# Altium PCB Microphone_Module_PCB_14-8-21.PcbDoc (part 2 of 2)
Units mm, origin at the board's own origin, x right, y up, seen from the top; angles counter-clockwise.
Board outline 220 x 220 mm, 4 copper layers (Top Layer, Layer 3, Layer 4, Bottom Layer), stack 0.683 mm thick; 104 components, 72 nets, 396 pads, 233 vias.
Unrouted connection lines stored in the file: 15.
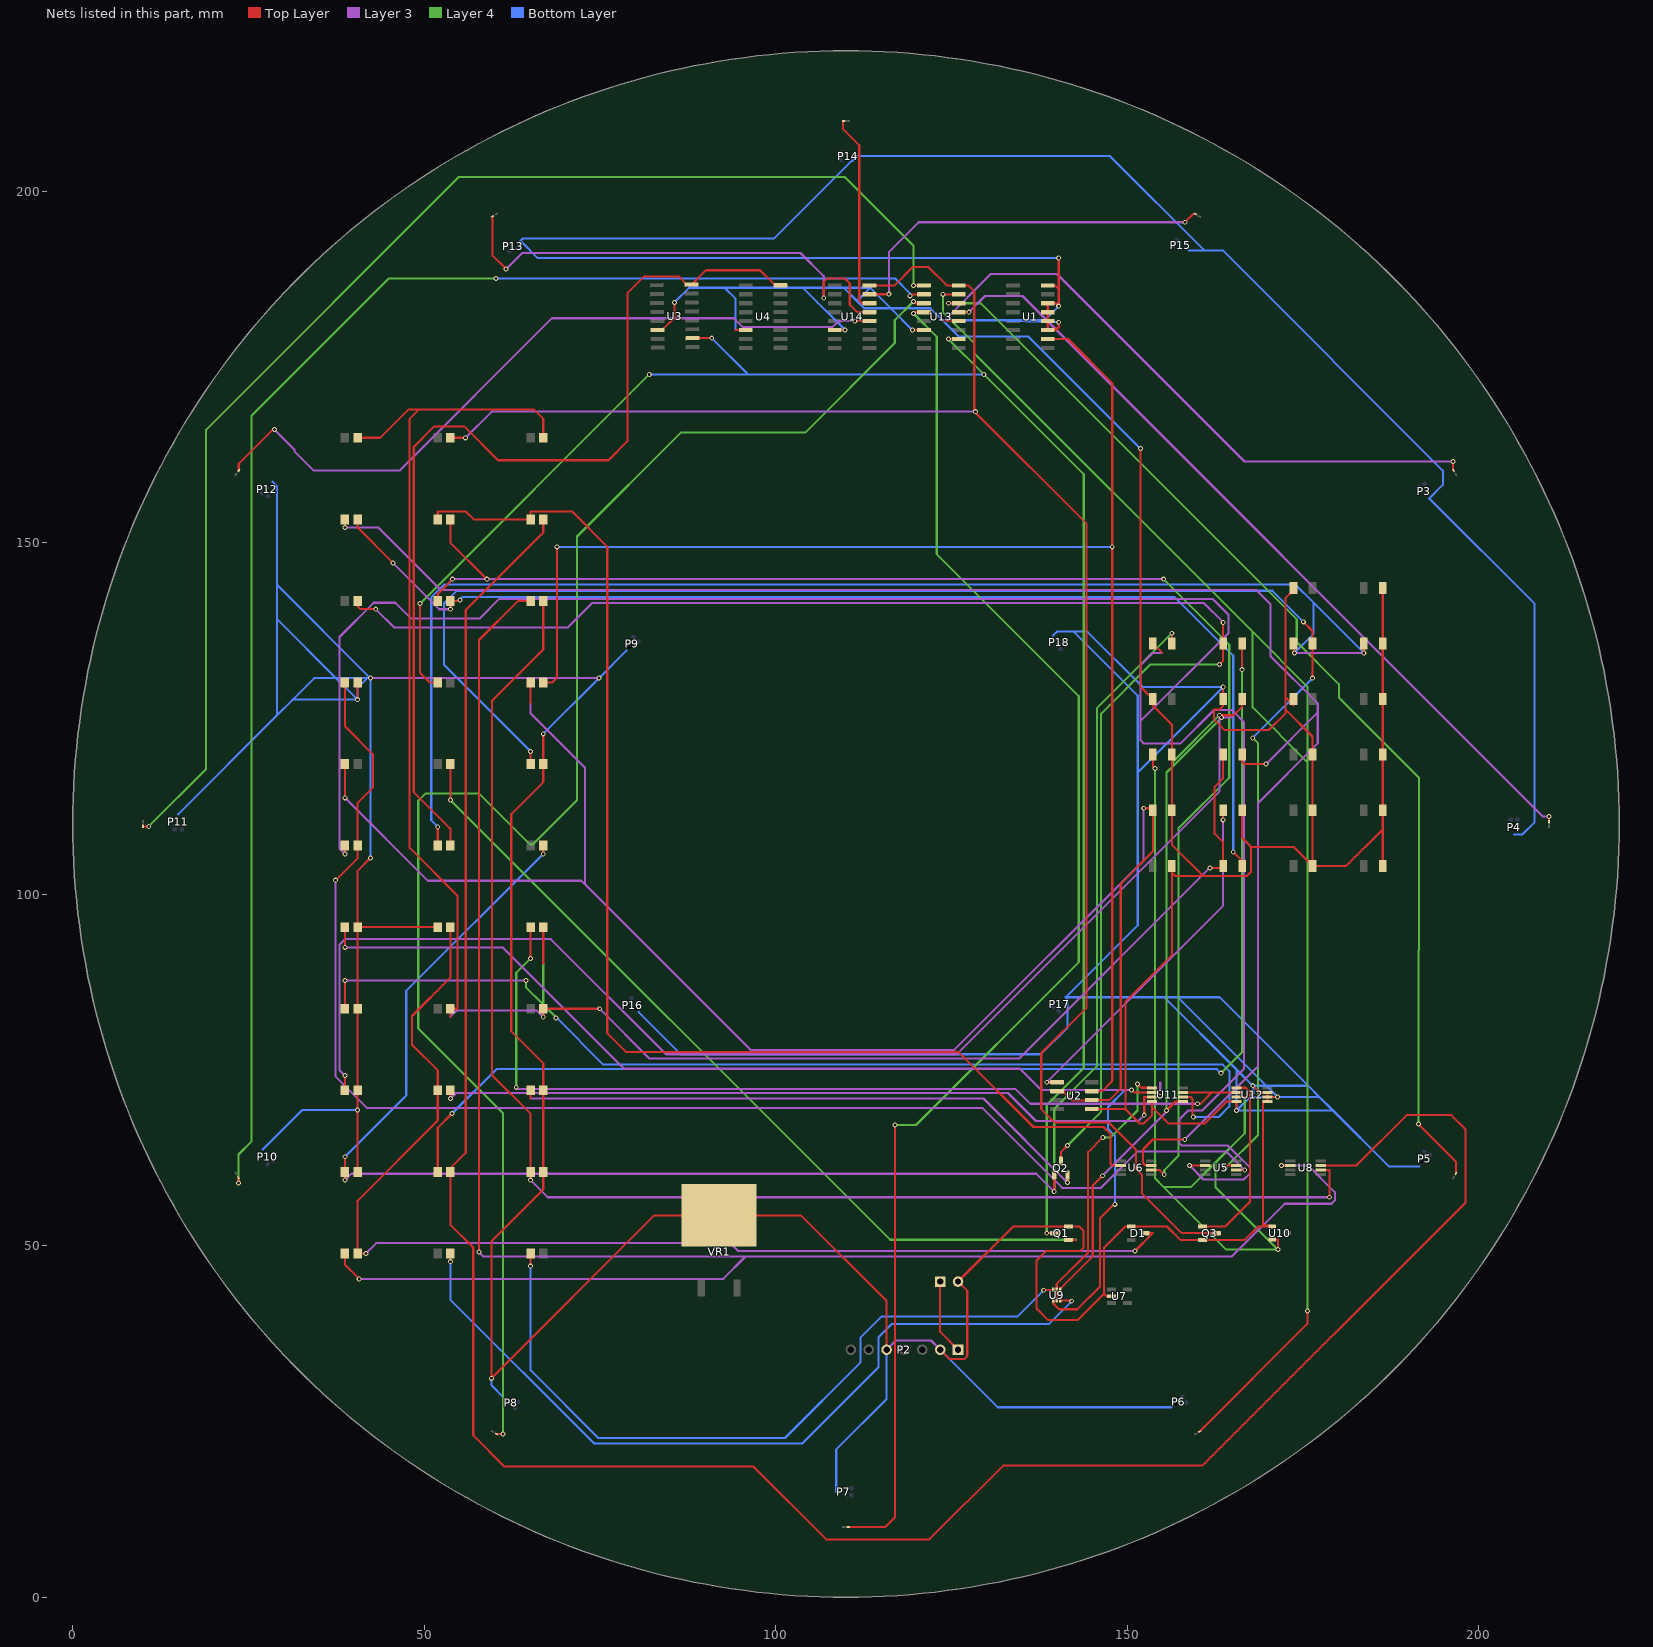
[diagram p4: the nets of this part, all layers, seen from the top]

## Via types
v1: diameter 0.7, hole 0.4, Top Layer to Bottom Layer, 233 vias

## Nets (pads, with @x,y where several pads share a name; then routed paths per layer and width w, separated by ;. In a path a pad name is that pad's centre, name@x,y a point inside that pad or via, vN(x,y) a via of type N, cw(c..) or ccw(c..) an arc to the next point about the centre after c; other vN are vias at no path point) (continued)
GND: C1.1 C2.1 C3.1 C5.1 C6.1 C7.1 C8.1 C10.1 C11.1 C15.2 C16.1 C17.1 C18.1 C19.1 C20.2 C21.2 C22.2 D1.1 P1.2 P2.2 P2.5 P3.3 P4.3 P5.3 P6.3 P7.3 P8.3 P9.3 P10.3 P11.3 P12.3 P13.3 P14.3 P15.3 P16.3 P17.3 P18.3 Q1.2 Q3.2 R7.2 R8.2 R18.2 R19.2 R20.2 R26.1 R27.1 R28.2 R29.2 U1.3 U1.4 U1.5 U1.6 U1.8 U2.1 U3.14 U4.14 U7.2 U10.1 U11.4 U12.4 U12.5 U12.6 U12.7 U13.14 U14.14 VR1.2 | length 1685.4
  Top Layer w0.3: R18.2@40.522,60.512 v1(40.522,69.317) R29.2@40.522,72.115 R28.2@40.522,83.718 R27.1@40.522,95.321 ; v1(40.522,127.686) R8.2@40.522,130.131 ; v1(42.342,105.156) 40.522,103.336 R27.1@40.522,95.321 ; R26.1@51.925,95.321 R27.1@40.522,95.321 ; v1(66.929,122.829) R7.2@66.929,118.528 66.929,115.951 62.382,111.404 62.382,80.518 66.929,75.971 R19.2@66.929,72.115 R20.2@66.929,60.512 66.929,58.013 59.563,50.648 v1(59.563,31.14) 82.747,54.325 VR1.2@91.952,54.325 103.587,54.325 115.776,42.136 P2.5@115.776,35.219 ; U3.14@83.188,180.294 83.873,180.294 85.598,182.019 v1(85.598,184.201) ; 94.296,180.275 U4.14@95.74,180.275 ; U14.14@108.407,180.274 v1(109.869,180.274) ; v1(119.446,180.274) U13.14@121.08,180.274 ; P2.2@123.396,35.219 124.706,33.909 126.873,33.909 127.254,34.29 127.254,43.588 P1.2@125.936,44.907 133.768,52.739 Q1.2@141.632,52.739 143.206,52.739 143.766,52.18 143.766,49.724 143.321,49.279 138.504,49.279 137.096,47.872 137.096,41.115 138.795,39.416 142.931,39.416 146.695,43.18 ; U1.8@138.703,186.624 139.7,186.624 140.259,186.066 ; v1(140.259,181.381) 140.259,180.657 ; v1(140.259,190.5) 140.259,186.066 ; U2.1@144.967,69.454 149.571,69.454 149.709,69.454 151.765,67.398 152.361,67.398 153.543,68.58 153.543,69.73 ; U7.2@147.752,42.815 147.06,42.815 146.695,43.18 ; 149.751,69.412 149.751,84.721 156.352,91.322 156.352,103.103 ; v1(151.892,163.398) 151.892,129.521 C21.2@153.652,127.761 153.652,126.853 156.352,124.153 C19.1@156.352,119.858 C1.1@156.352,111.955 156.352,107.061 160.803,102.61 ; U11.4@153.538,70.523 153.543,70.517 153.543,69.73 ; C11.1@156.352,104.052 156.352,103.103 ; v1(163.655,129.489) C22.2@163.655,127.761 163.655,126.804 163.119,126.268 162.369,126.268 162.369,124.854 163.83,123.393 170.18,123.393 172.542,125.755 172.542,126.27 ; v1(165.557,69.241) U12.4@165.557,70.523 164.147,70.523 161.003,67.378 155.894,67.378 153.543,69.73 ; C2.1@166.355,111.955 166.355,108.003 167.64,106.719 ; v1(167.869,72.771) 168.817,71.823 U12.7@169.977,71.823 U12.6@169.977,71.173 ; v1(171.399,71.173) U12.6@169.977,71.173 ; C20.2@173.659,127.761 173.659,126.872 173.364,127.166 172.542,127.988 ; C15.2@173.659,143.568 173.659,143.281 172.542,142.165 172.542,127.988 ; C8.1@186.362,104.052 186.362,109.22 ; C16.1@186.362,143.568 C17.1@186.362,135.664 C18.1@186.362,127.761 C3.1@186.362,119.858 C10.1@186.362,111.955 186.362,109.22 ; U1.3@138.703,180.274 139.876,180.274 140.259,180.657 ; U1.3@138.703,180.274 140.259,180.657 ; U1.3@138.703,180.274 U1.4@138.703,181.544 U1.5@138.703,182.814 U1.6@138.703,184.084 139.842,184.084 v1(140.259,183.667) 140.259,186.066 ; 146.695,43.18 146.695,49.711 149.723,52.739 D1.1@150.572,52.739 155.668,52.739 157.568,50.839 Q3.2@160.734,50.839 166.714,50.839 168.604,52.729 U10.1@170.656,52.729 169.682,52.946 169.342,53.021 169.342,70.523 U12.5@169.977,70.523 U12.6@169.977,71.173 ; 156.352,103.103 156.845,102.61 160.803,102.61 ; 160.803,102.61 167.005,102.61 167.64,103.245 167.64,106.719 ; 167.64,106.719 173.692,106.719 C7.1@176.359,104.052 ; 172.542,126.27 172.542,127.988 ; 172.542,126.27 176.359,122.453 C5.1@176.359,119.858 C6.1@176.359,111.955 176.359,105.095 C7.1@176.359,104.052 ; C7.1@176.359,104.052 176.359,104.038 181.18,104.038 186.362,109.22
  Layer 3 w0.3: v1(42.342,130.759) v1(74.859,130.759) ; P2.5@115.776,35.219 117.082,36.525 122.089,36.525 P2.2@123.396,35.219
  Bottom Layer w0.3: P11.3@14.984,111.383 29.032,125.431 ; P10.3@27.021,63.689 32.649,69.317 v1(40.522,69.317) ; P12.3@28.407,158.704 28.411,158.704 28.733,158.383 28.733,158.379 29.032,158.08 29.032,144.069 ; 40.522,130.131 40.522,129.371 ; v1(42.342,105.156) v1(42.342,130.759) ; v1(59.563,31.14) 59.563,30.134 P8.3@61.294,28.404 ; v1(66.929,122.829) v1(74.859,130.759) P9.3@78.742,134.642 ; P16.3@80.516,83.239 86.514,77.241 137.718,77.241 141.503,81.026 141.503,85.113 P17.3@141.258,85.358 ; v1(85.598,184.201) 87.681,186.284 92.71,186.284 ; 94.296,180.275 94.296,184.697 92.71,186.284 ; P7.3@108.617,14.984 108.617,21.035 115.776,28.194 P2.5@115.776,35.219 ; v1(109.869,180.274) 103.86,186.284 ; P14.3@111.383,205.015 147.566,205.015 160.985,191.596 ; 111.488,205.015 111.359,204.886 111.359,204.731 110.978,204.35 110.823,204.35 99.741,193.269 63.984,193.269 P13.3@63.691,192.976 66.167,190.5 v1(140.259,190.5) ; v1(119.446,180.274) 116.344,183.376 ; P2.2@123.396,35.219 131.59,27.024 P6.3@156.309,27.024 ; P18.3@139.482,136.835 140.011,137.363 142.392,137.363 ; v1(140.259,181.381) 130.773,181.659 ; v1(140.259,183.667) 138.251,181.659 130.773,181.659 ; v1(151.892,163.398) 135.941,179.349 126.035,179.349 123.725,181.659 ; P15.3@158.707,191.596 160.985,191.596 ; P5.3@191.593,61.296 187.223,61.296 179.278,69.241 ; P4.3@205.044,108.479 206.168,108.479 207.96,110.271 207.96,141.331 P3.3@192.979,156.311 194.919,158.251 194.919,160.264 163.586,191.596 160.985,191.596 ; 29.032,125.431 29.032,139.176 ; 29.032,125.431 31.287,127.686 ; 29.032,139.176 37.449,130.759 ; 29.032,139.176 29.032,144.069 ; 29.032,144.069 v1(42.342,130.759) ; 31.287,127.686 34.36,130.759 37.449,130.759 ; 31.287,127.686 v1(40.522,127.686) ; 37.449,130.759 41.91,130.759 ; 37.449,130.759 v1(40.522,127.686) ; v1(40.522,127.686) 40.522,129.371 ; 40.522,129.371 41.91,130.759 ; 41.91,130.759 v1(42.342,130.759) ; 92.71,186.284 103.86,186.284 ; 103.86,186.284 109.677,186.284 ; 109.677,186.284 111.557,184.404 ; 109.677,186.284 113.436,186.284 ; 111.557,184.404 112.585,183.376 116.344,183.376 ; 111.557,184.404 113.436,186.284 ; 113.436,186.284 116.344,183.376 ; 116.344,183.376 122.008,183.376 123.725,181.659 ; 123.725,181.659 130.773,181.659 ; P17.3@141.258,85.358 155.282,85.358 ; P17.3@141.258,85.358 151.499,95.598 151.499,117.333 ; 142.392,137.363 144.323,137.363 152.197,129.489 v1(163.655,129.489) 151.499,117.333 ; 142.392,137.363 151.499,128.257 151.499,117.333 ; 155.282,85.358 157.214,85.358 ; 155.282,85.358 165.557,75.082 ; 157.214,85.358 163.161,85.358 175.748,72.771 ; 157.214,85.358 169.801,72.771 ; v1(165.557,69.241) 179.278,69.241 ; v1(165.557,69.241) 167.49,71.173 ; v1(165.557,69.241) 165.557,75.082 ; 165.557,75.082 v1(167.869,72.771) ; 167.49,71.173 v1(171.399,71.173) ; 167.49,71.173 167.957,71.641 167.957,72.682 v1(167.869,72.771) ; v1(167.869,72.771) 169.801,72.771 ; 169.801,72.771 175.748,72.771 ; 169.801,72.771 v1(171.399,71.173) ; v1(171.399,71.173) 177.346,71.173 ; 175.748,72.771 177.346,71.173 ; 177.346,71.173 179.278,69.241
in: Q1.3 R3.1 U3.2 U13.2 | length 257.2
  Top Layer w0.3: v1(49.403,141.351) 49.403,131.528 50.8,130.131 R3.1@51.925,130.131 ; U3.2@88.16,179.113 v1(90.907,179.113) ; v1(124.568,179.004) U13.2@126.03,179.004 ; v1(138.557,51.791) v1(138.557,51.791) Q1.3@139.672,51.789
  Layer 4 w0.3: v1(49.403,141.351) v1(82.017,173.965) ; v1(124.568,179.004) v1(129.608,173.965) 143.819,159.754 143.819,75.289 138.557,70.028 v1(138.557,51.791)
  Bottom Layer w0.3: v1(82.017,173.965) 96.055,173.965 ; 90.272,179.113 v1(90.907,179.113) 96.055,173.965 ; v1(129.608,173.965) 96.055,173.965
L1: D2.2 U13.4 | length 89.7
  Top Layer w0.3: 123.916,181.544 U13.4@126.03,181.544 ; v1(196.345,161.569) 196.378,161.537 196.378,160.353 D2.2@196.428,160.303
  Layer 3 w0.3: 123.916,181.544 130.611,188.239 140.021,188.239 166.691,161.569 v1(196.345,161.569)
L2: D3.2 U13.5 | length 116.3
  Top Layer w0.3: U13.5@126.03,182.814 v1(127.483,182.814) ; D3.2@210.005,110.35 v1(210.005,111.074)
  Layer 3 w0.3: v1(127.483,182.814) 129.783,185.115 135.103,185.115 209.144,111.074 v1(210.005,111.074)
L3: D4.2 U13.6 | length 157.9
  Top Layer w0.3: v1(124.562,184.084) U13.6@126.03,184.084 ; v1(191.425,67.325) 196.778,61.972 D4.2@196.778,60.303
  Layer 4 w0.3: v1(124.562,184.084) 129.148,184.084 174.117,139.116 174.117,135.89 180.111,129.896 180.111,127.991 191.516,116.586 191.516,92.055 191.425,91.964 v1(191.425,67.325)
L4: D5.2 U13.7 | length 213.6
  Top Layer w0.3: v1(123.8,185.354) U13.7@126.03,185.354 ; D5.2@160.303,23.572 175.641,38.91 v1(175.641,40.716)
  Layer 4 w0.3: v1(123.8,185.354) 123.8,182.804 128.233,178.371 128.233,176.936 167.843,137.326 ; v1(175.641,40.716) 175.641,118.796 ; 167.843,137.326 175.641,129.528 175.641,118.796 ; 167.843,137.326 167.843,126.594 175.641,118.796
L5: D6.2 U13.12 | length 202.3
  Top Layer w0.3: D6.2@110.35,10 115.57,10 116.967,11.397 v1(116.967,67.183) ; v1(119.609,182.626) 119.797,182.814 U13.12@121.08,182.814
  Layer 4 w0.3: v1(116.967,67.183) 119.956,67.183 143.117,90.344 143.117,128.179 122.911,148.386 122.911,179.324 v1(119.609,182.626)
L6: D7.2 U13.11 | length 227.3
  Top Layer w0.3: D7.2@60.303,23.222 v1(61.214,23.222) ; v1(119.609,184.328) 119.852,184.084 U13.11@121.08,184.084
  Layer 4 w0.3: v1(61.214,23.222) 61.214,68.834 49.15,80.898 49.15,113.318 50.157,114.325 57.81,114.325 65.024,107.112 65.481,107.112 71.74,113.37 71.74,150.904 86.51,165.675 104.182,165.675 116.942,178.434 116.942,181.661 v1(119.609,184.328)
L7: D8.2 U13.10 | length 215.8
  Top Layer w0.3: v1(23.571,58.928) D8.2@23.571,59.696 ; v1(119.111,185.137) 119.22,185.137 119.437,185.354 U13.10@121.08,185.354
  Layer 4 w0.3: v1(23.571,58.928) 23.571,62.992 25.448,64.869 25.448,168.107 44.946,187.604 v1(60.198,187.604)
  Bottom Layer w0.3: v1(60.198,187.604) 116.992,187.604 119.161,185.436 119.161,185.187 v1(119.111,185.137)
L8: D9.2 U13.9 | length 187.3
  Top Layer w0.3: D9.2@10.001,109.65 10.007,109.655 v1(10.81,109.655) ; v1(119.609,186.614) 119.619,186.624 U13.9@121.08,186.624
  Layer 4 w0.3: v1(10.81,109.655) 18.974,117.819 18.974,166.085 54.933,202.044 109.813,202.044 119.609,192.249 v1(119.609,186.614)
L9: D10.2 U14.4 | length 105.1
  Top Layer w0.3: D10.2@23.618,160.267 23.618,161.272 28.449,166.103 v1(28.69,166.103) ; v1(111.252,181.544) U14.4@113.357,181.544
  Layer 3 w0.3: v1(28.69,166.103) 31.526,163.267 31.526,163.026 34.285,160.267 46.482,160.267 68.16,181.945 94.026,181.945 95.25,180.721 108.102,180.721 108.926,181.544 v1(111.252,181.544)
L10: D11.2 U14.5 | length 71.7
  Top Layer w0.3: D11.2@59.697,196.428 59.697,190.9 v1(61.646,188.951) ; v1(106.832,184.81) 106.832,187.122 107.315,187.604 109.855,187.604 110.541,186.919 110.541,183.856 111.582,182.814 U14.5@113.357,182.814
  Layer 3 w0.3: v1(61.646,188.951) 63.926,191.23 103.519,191.23 106.832,187.917 v1(106.832,184.81)
L11: D12.2 U14.6 | length 28.2
  Top Layer w0.3: D12.2@109.65,210 109.55,210 109.55,208.89 111.887,206.553 111.887,184.468 112.27,184.084 U14.6@113.357,184.084
L12: D13.2 U14.7 | length 54.6
  Top Layer w0.3: U14.7@113.357,185.354 113.371,185.369 v1(116.093,185.369) ; v1(158.212,195.605) 159.385,196.778 D13.2@159.697,196.778
  Layer 3 w0.3: v1(116.093,185.369) 116.093,191.361 120.338,195.605 v1(158.212,195.605)
NetC1_2: C1.2 R1.1 R2.1 U2.2 U2.6 | length 237.2
  Top Layer w0.3: v1(38.722,113.729) R1.1@38.722,118.528 ; 65.129,127.13 R2.1@65.129,130.131 ; U2.6@140.027,71.994 140.177,71.844 141.003,71.844 142.184,70.663 144.906,70.663 U2.2@144.967,70.724 147.458,70.724 149.081,72.348 149.081,101.517 153.652,106.088 C1.2@153.652,111.955 153.652,112.243 v1(152.349,112.243)
  Layer 3 w0.3: v1(38.722,113.729) 50.521,101.93 72.359,101.93 72.873,101.416 ; 65.129,127.13 65.126,127.127 65.126,125.73 72.873,117.983 72.873,101.416 ; v1(152.349,112.243) 152.349,104.8 125.415,77.866 96.423,77.866 72.873,101.416
NetC2_2: C2.2 U2.5 | length 50.5
  Top Layer w0.3: v1(138.568,73.264) U2.5@140.027,73.264 ; v1(163.655,110.592) C2.2@163.655,111.955
  Layer 3 w0.3: v1(138.568,73.264) 163.655,98.352 v1(163.655,110.592)
NetC4_1: C4.1 R11.1 U6.3 | length 248.8
  Top Layer w0.3: v1(38.722,152.171) R11.1@38.722,153.337 ; U6.3@153.418,61.425 153.352,61.49 152.541,61.49 152.245,61.786 152.245,63.701 153.67,65.126 v1(158.191,65.126) ; C4.1@166.355,119.858 166.355,118.863 166.688,118.531 v1(169.763,118.531)
  Layer 3 w0.3: v1(38.722,152.171) 43.434,152.171 52.324,143.281 168.377,143.281 170.383,141.275 170.383,133.883 177.114,127.152 177.114,125.882 ; v1(158.191,65.126) 168.631,75.565 168.631,112.979 177.114,121.463 177.114,125.882 ; v1(169.763,118.531) 177.114,125.882
NetC9_1: C9.1 R11.2 R14.2 | length 165.9
  Top Layer w0.3: R11.2@40.522,153.337 40.522,152.171 v1(45.542,147.151) ; v1(53.725,140.557) R14.2@53.725,141.734 54.917,141.734 v1(55.067,141.884) ; v1(165.089,106.016) 166.355,104.75 C9.1@166.355,104.052
  Layer 3 w0.3: v1(45.542,147.151) 52.137,140.557 v1(53.725,140.557)
  Bottom Layer w0.3: v1(55.067,141.884) 55.503,142.32 156.714,142.32 165.089,133.945 v1(165.089,106.016)
NetC12_1: C12.1 R17.1 | length 183.8
  Top Layer w0.3: R17.1@51.925,60.512 51.925,66.784 v1(53.95,68.809) ; v1(166.355,131.953) C12.1@166.355,135.664
  Layer 4 w0.3: v1(163.347,74.549) 166.355,77.557 v1(166.355,131.953)
  Bottom Layer w0.3: v1(53.95,68.809) 60.274,75.133 162.763,75.133 v1(163.347,74.549)
NetC12_2: C12.2 Q2.3 R15.2 | length 219.7
  Top Layer w0.3: R15.2@40.522,141.734 40.522,140.97 40.929,140.564 v1(43.104,140.564) ; Q2.3@140.569,62.039 140.569,63.328 v1(141.503,64.262) ; v1(163.119,132.69) 163.655,133.226 C12.2@163.655,135.664 v1(163.655,138.684)
  Layer 3 w0.3: v1(43.104,140.564) 45.72,137.947 70.409,137.947 73.894,141.432 160.907,141.432 v1(163.655,138.684)
  Layer 4 w0.3: v1(141.503,64.262) 146.296,69.055 146.296,125.697 153.289,132.69 v1(163.119,132.69)
NetC13_1: C13.1 R7.1 U5.3 | length 238.4
  Top Layer w0.3: R7.1@65.129,118.528 v1(65.129,120.317) ; v1(163.957,61.087) 164.295,61.425 U5.3@165.488,61.425 ; v1(175.057,138.76) 176.359,137.458 C13.1@176.359,135.664 v1(176.359,130.74)
  Layer 4 w0.3: v1(163.957,61.087) 168.631,65.761 168.631,121.488 v1(167.869,122.25)
  Bottom Layer w0.3: v1(65.129,120.317) 52.807,132.639 52.807,141.376 54.61,143.18 170.637,143.18 v1(175.057,138.76) ; v1(167.869,122.25) v1(176.359,130.74)
NetC13_2: C13.2 C17.2 R5.1 | length 194
  Top Layer w0.3: R5.1@51.925,106.924 v1(51.925,109.593) ; C13.2@173.659,135.664 173.659,134.494 v1(173.812,134.341) ; v1(183.662,134.341) C17.2@183.662,135.664
  Layer 3 w0.3: v1(173.812,134.341) v1(183.662,134.341)
  Bottom Layer w0.3: v1(51.925,109.593) 51.003,110.515 51.003,142.24 52.832,144.069 173.934,144.069 176.53,141.472 ; v1(173.812,134.341) 176.53,137.058 176.53,141.472 ; v1(183.662,134.341) 176.53,141.472
NetC14_1: C14.1 Q2.1 R16.2 R18.1 | length 251.8
  Top Layer w0.3: v1(38.722,59.335) R18.1@38.722,60.512 v1(38.722,62.662) ; v1(66.929,105.74) R16.2@66.929,106.924 ; v1(139.619,57.702) Q2.1@139.619,60.079 ; C14.1@156.352,135.664 v1(156.352,137.135)
  Layer 3 w0.3: v1(38.722,59.335) 39.636,60.249 137.073,60.249 v1(139.619,57.702)
  Layer 4 w0.3: v1(139.619,57.702) 139.619,69.465 145.696,75.541 145.696,126.479 v1(156.352,137.135)
  Bottom Layer w0.3: v1(38.722,62.662) 47.445,71.384 47.445,86.256 v1(66.929,105.74)
NetC14_2: C14.2 R6.1 U5.6 | length 308.4
  Top Layer w0.3: v1(38.71,105.74) 38.71,106.924 R6.1@38.722,106.924 v1@38.722,105.753 ; C14.2@153.652,135.664 154.979,134.337 ; v1(158.877,61.417) 158.884,61.425 U5.6@161.119,61.425
  Layer 3 w0.3: v1(38.71,105.74) 38.697,105.753 37.948,106.502 37.948,136.601 42.824,141.478 45.872,141.478 48.133,139.217 57.861,139.217 60.626,141.982 162.208,141.982 164.414,139.776 164.414,137.16 151.917,124.663 ; 154.979,134.337 153.67,134.337 151.917,132.585 151.917,124.663 ; v1(158.877,61.417) 160.858,59.436 166.599,59.436 167.488,60.325 167.488,61.087 164.338,64.237 157.797,64.237 157.429,64.605 157.429,67.97 158.701,69.243 160.662,69.243 166.624,75.205 166.624,97.079 166.624,124.46 165.278,125.806 164.858,126.226 163.881,126.226 162.357,126.226 157.568,121.437 152.4,121.437 151.917,121.92 151.917,124.663
NetC19_2: C19.2 U10.2 U12.3 | length 121.4
  Top Layer w0.3: C19.2@153.652,119.858 153.652,118.204 v1(153.949,117.907) ; U12.3@165.557,71.173 166.724,71.173 ; U10.2@170.656,50.9 171.45,50.9 v1(171.45,49.454)
  Layer 4 w0.3: v1(153.949,117.907) 153.949,59.588 155.194,58.344 ; 166.724,71.173 166.724,66.013 162.56,61.849 ; 155.194,58.344 164.084,49.454 v1(171.45,49.454) 162.56,58.344 162.56,61.849 ; 155.194,58.344 159.055,58.344 162.56,61.849
NetC22_1: C22.1 R29.1 U9.4 U11.5 | length 289.9
  Top Layer w0.3: R29.1@38.722,72.115 v1(38.722,74.206) ; U9.4@140.478,43.779 140.478,43.899 145.101,48.523 145.101,58.572 v1(146.488,59.958) ; v1(155.596,69.243) 156.876,70.523 U11.5@157.957,70.523 ; v1(163.119,125.476) 165.149,125.476 166.355,126.682 C22.1@166.355,127.761
  Layer 3 w0.3: v1(38.722,74.206) 37.948,74.981 37.948,92.837 38.735,93.624 68.021,93.624 84.403,77.243 125.757,77.243 163.119,114.605 v1(163.119,125.476) ; v1(146.488,59.958) 155.596,69.066 v1(155.596,69.243) ; v1(163.438,125.16) 165.075,125.16
  Layer 4 w0.3: v1(155.596,69.243) 155.596,117.318 156.531,118.253 ; v1(163.119,125.476) 156.531,118.888 156.531,118.253 ; v1(163.438,125.16) 156.531,118.253
NetD1_3: D1.3 R23.2 R24.1 R26.2 | length 171.3
  Top Layer w0.3: v1(41.699,48.908) R23.2@40.522,48.908 40.522,56.423 51.925,67.826 R24.1@51.925,72.115 51.925,74.948 48.26,78.613 48.26,82.677 53.725,88.142 R26.2@53.725,95.321 ; v1(151.105,49.251) 153.643,51.789 D1.3@152.532,51.789
  Layer 3 w0.3: v1(41.699,48.908) 43.159,50.368 93.574,50.368 94.691,49.251 v1(151.105,49.251)
NetP1_1: P1.1 P2.1 | length 10.7
  Top Layer w0.3: P1.1@123.396,44.907 123.396,37.759 P2.1@125.936,35.219
NetQ1_1: Q1.1 R4.2 | length 121.1
  Top Layer w0.3: v1(53.725,113.407) R4.2@53.725,118.528 ; Q1.1@141.632,50.839 142.725,50.839
  Layer 4 w0.3: v1(53.725,113.407) 116.281,50.851 142.714,50.851 142.725,50.839
NetQ2_2: Q2.2 R19.1 | length 83.6
  Top Layer w0.3: 65.129,70.945 R19.1@65.129,72.115 ; v1(141.519,58.988) Q2.2@141.519,60.079
  Layer 3 w0.3: 65.129,70.945 65.132,70.942 129.565,70.942 v1(141.519,58.988)
NetQ3_1: Q3.1 U12.1 | length 26
  Top Layer w0.3: Q3.1@160.734,52.739 163.932,52.739 167.488,56.295 167.488,71.857 166.871,72.473 U12.1@165.557,72.473
NetQ3_3: Q3.3 R30.2 U13.8 U14.8 | length 254.7
  Top Layer w0.3: R30.2@53.725,164.94 v1(55.873,164.94) ; U14.8@113.357,186.624 116.912,186.624 119.518,189.23 121.702,189.23 124.308,186.624 U13.8@126.03,186.624 127.396,186.624 128.245,185.776 128.245,168.681 128.27,168.656 v1(128.415,168.656) ; v1@128.343,168.583 144.227,152.699 144.227,83.877 137.77,77.419 137.77,69.444 139.7,67.513 147.422,67.513 151.255,63.68 151.255,60.988 152.095,60.147 152.095,57.454 157.759,51.789 Q3.3@162.694,51.789
  Layer 3 w0.3: v1(55.873,164.94) 59.588,168.656 v1(128.415,168.656)
NetR2_2: R2.2 U1.2 U2.3 | length 214.4
  Top Layer w0.3: R2.2@66.929,130.131 68.206,130.131 68.885,130.81 v1(68.885,149.428) ; U1.2@138.703,179.004 141.58,179.004 147.879,172.705 v1(147.879,149.428) 147.879,73.442 146.431,71.994 U2.3@144.967,71.994
  Bottom Layer w0.3: v1(68.885,149.428) v1(147.879,149.428)
NetR5_2: R5.2 U3.8 U4.8 | length 139.7
  Top Layer w0.3: R5.2@53.725,106.924 53.725,109.317 48.503,114.54 48.503,163.641 51.435,166.573 55.677,166.573 60.498,161.752 76.205,161.752 78.9,164.447 78.9,185.529 81.28,187.909 86.182,187.909 87.36,186.732 U3.8@88.023,186.732 90.068,188.777 97.765,188.777 99.913,186.629 U4.8@100.685,186.629
NetR6_2: R6.2 R8.1 U5.2 | length 200.3
  Top Layer w0.3: v1(37.389,102.006) 40.522,105.14 R6.2@40.522,106.924 40.522,113.011 42.692,115.181 42.692,119.931 38.722,123.901 R8.1@38.722,130.131 ; U5.2@165.488,60.764 166.718,60.764 v1(166.726,60.757)
  Layer 3 w0.3: v1(37.389,102.006) 37.389,74.066 41.834,69.621 129.374,69.621 140.767,58.229 146.285,58.229 151.48,63.424 164.059,63.424 v1(166.726,60.757)
NetR9_1: R9.1 R12.1 U6.6 | length 181.4
  Top Layer w0.3: R9.1@51.925,153.337 51.925,154.457 55.905,154.457 57.026,153.337 R12.1@65.129,153.337 65.129,154.457 71.044,154.457 76.035,149.467 76.035,80.252 78.74,77.546 126.035,77.546 136.683,66.898 146.64,66.898 147.646,65.892 147.646,61.628 147.849,61.425 U6.6@149.049,61.425
NetR9_2: R9.2 R14.1 U6.2 | length 210.3
  Top Layer w0.3: R14.1@51.925,141.734 51.925,142.728 v1(54.028,144.831) ; R9.2@53.725,153.337 53.725,150.033 v1(58.928,144.831) ; U6.2@153.418,60.764 154.628,60.764 v1(155.27,60.122)
  Layer 3 w0.3: v1(54.028,144.831) v1(58.928,144.831) v1(155.194,144.831)
  Layer 4 w0.3: v1(155.194,144.831) 164.516,135.509 164.516,116.586 157.302,109.372 157.302,62.789 155.27,60.757 v1(155.27,60.122)
NetR12_2: R12.2 R17.2 U8.3 | length 339.1
  Top Layer w0.3: R12.2@66.929,153.337 66.929,151.46 55.905,140.437 55.905,63.221 53.725,61.041 R17.2@53.725,60.512 53.725,53.005 56.972,49.759 56.972,23.027 61.414,18.585 96.839,18.585 107.192,8.232 121.868,8.232 132.353,18.717 160.703,18.717 198.146,56.16 198.146,66.547 196.113,68.58 189.763,68.58 182.608,61.425 U8.3@177.559,61.425
NetR13_2: R13.2 R20.1 U8.2 | length 207.5
  Top Layer w0.3: v1(65.129,59.331) R20.1@65.129,60.512 65.129,68.755 59.639,74.244 59.639,127.533 66.929,134.823 R13.2@66.929,141.734 ; U8.2@177.559,60.764 178.791,60.764 v1(178.791,56.896)
  Layer 3 w0.3: v1(65.129,59.331) 67.564,56.896 v1(178.791,56.896)
NetR21_1: R21.1 U9.6 | length 105.8
  Top Layer w0.3: v1(65.129,47.096) R21.1@65.129,48.908 ; v1(138.122,43.668) 138.178,43.723 139.468,43.723 139.478,43.733 U9.6@139.478,43.779
  Bottom Layer w0.3: v1(65.129,47.096) 65.129,32.288 74.756,22.661 101.321,22.661 112.086,33.425 112.086,36.965 115.084,39.962 134.417,39.962 v1(138.122,43.668)
NetR22_2: R22.2 U9.3 | length 115.9
  Top Layer w0.3: v1(53.725,47.731) R22.2@53.725,48.908 ; U9.3@140.538,42.209 142.004,42.209 v1(142.105,42.108)
  Bottom Layer w0.3: v1(53.725,47.731) 53.725,42.318 74.158,21.886 103.817,21.886 114.626,32.694 114.626,36.965 116.553,38.893 138.889,38.893 v1(142.105,42.108)
NetR24_2: R24.2 U11.3 | length 105.9
  Top Layer w0.3: v1(53.725,70.942) R24.2@53.725,72.115 ; v1(152.425,68.58) 152.425,71.173 U11.3@153.538,71.173
  Layer 3 w0.3: v1(53.725,70.942) 54.513,71.73 133.045,71.73 137.033,67.742 151.587,67.742 v1(152.425,68.58)
NetR25_1: R25.1 U11.7 U12.2 | length 131.8
  Top Layer w0.3: v1(65.129,90.884) R25.1@65.129,95.321 ; U11.7@157.957,71.823 162.061,71.823 ; v1(160.023,70.203) 160.441,70.203 162.061,71.823 ; U12.2@165.557,71.823 162.061,71.823
  Layer 3 w0.3: v1(63.094,72.542) 63.348,72.288 134.137,72.288 136.223,70.203 v1(160.023,70.203)
  Layer 4 w0.3: v1(63.094,72.542) 63.094,88.849 v1(65.129,90.884)
NetR25_2: R25.2 R28.1 U11.6 | length 161.6
  Top Layer w0.3: R28.1@38.722,83.718 v1(38.722,87.732) ; 66.929,90.196 R25.2@66.929,95.321 ; U11.6@157.957,71.173 159.056,71.173 159.273,70.955 159.273,68.444 v1(159.406,68.311)
  Layer 3 w0.3: v1(38.722,87.732) v1(64.465,87.732)
  Layer 4 w0.3: v1(64.465,87.732) 64.465,86.792 66.929,84.328 ; 66.929,90.196 66.929,84.328 ; v1(68.749,82.416) 68.749,82.508 66.929,84.328
  Bottom Layer w0.3: v1(68.749,82.416) 68.841,82.416 75.489,75.768 163.601,75.768 164.541,74.828 164.541,69.85 163.002,68.311 v1(159.406,68.311)
NetR27_2: R27.2 U9.1 U11.2 | length 168.8
  Top Layer w0.3: v1(38.722,92.456) R27.2@38.722,95.321 ; U9.1@139.478,42.209 139.478,41.789 140.3,40.967 142.923,40.967 146.126,44.17 146.126,53.917 147.909,55.699 147.936,55.699 148.134,55.898 v1(148.242,55.898) ; v1(150.618,72.143) 150.674,72.143 150.994,71.823 U11.2@153.538,71.823 v1(154.711,71.823)
  Layer 3 w0.3: v1(38.722,92.456) 61.138,92.456 78.41,75.184 134.747,75.184 137.768,72.163 150.598,72.163 v1(150.618,72.143) ; v1(154.711,71.823) 154.711,73.228
  Bottom Layer w0.3: v1(148.242,55.898) 148.242,65.646 147.281,66.607 147.281,69.75 149.674,72.143 v1(150.618,72.143)
NetU9_2: U9.2 U9.5 U11.1 | length 38.2
  Top Layer w0.3: U9.2@139.978,42.209 139.978,43.495 ; U9.5@139.978,43.779 139.978,44.577 144.444,49.042 144.444,63.323 v1(146.536,65.415) ; v1(151.475,73.009) 152.011,72.473 U11.1@153.538,72.473
  Layer 4 w0.3: v1(146.536,65.415) 147.653,65.415 151.475,69.237 v1(151.475,73.009)
peak: R13.1 R23.1 U8.6 | length 294.3
  Top Layer w0.3: R23.1@38.722,48.908 38.722,47.308 v1(40.742,45.288) ; v1(57.785,49.098) 57.785,136.169 63.35,141.734 R13.1@65.129,141.734 ; v1(171.958,61.417) 171.965,61.425 U8.6@173.19,61.425
  Layer 3 w0.3: v1(40.742,45.288) 92.532,45.288 95.707,48.463 ; v1(57.785,49.098) 58.42,48.463 95.707,48.463 ; v1(171.958,61.417) 175.756,61.417 179.541,57.633 179.541,56.454 179.07,55.984 172.417,55.984 164.897,48.463 95.707,48.463
ref_sensor: C4.2 C9.2 R10.2 R31.2 R32.2 R33.2 | length 265.3
  Top Layer w0.3: R10.2@40.522,164.94 43.732,164.94 47.777,168.986 49.276,168.986 ; 53.725,82.554 R33.2@53.725,83.718 54.737,83.718 54.737,99.797 47.93,106.604 47.93,167.64 49.276,168.986 ; v1(66.929,82.541) R31.2@66.929,83.718 v1(74.955,83.718) ; R32.2@66.929,164.94 66.929,167.64 65.582,168.986 49.276,168.986 ; v1(161.773,103.759) 163.655,103.759 C9.2@163.655,104.052 163.655,107.391 162.433,108.614 162.433,115.291 163.655,116.513 C4.2@163.655,119.858
  Layer 3 w0.3: 53.725,82.554 54.635,83.464 66.005,83.464 v1(66.929,82.541) ; v1(74.955,83.718) 82.028,76.645 134.659,76.645 v1(161.773,103.759)
pads on no net: D1.2 P2.3 P2.7 P3. P3.4 P3.5 P4. P4.4 P4.5 P5. P5.4 P5.5 P6. P6.4 P6.5 P7. P7.4 P7.5 P8. P8.4 P8.5 P9. P9.4 P9.5 P10. P10.4 P10.5 P11. P11.4 P11.5 P12. P12.4 P12.5 P13. P13.4 P13.5 P14. P14.4 P14.5 P15. P15.4 P15.5 P16. P16.4 P16.5 P17. P17.4 P17.5 P18. P18.4 P18.5 U1.15 U2.7 U4.9 U4.10 U4.11 U4.12 U5.1 U5.5 U5.8 U6.1 U6.5 U6.8 U7.1 U8.1 U8.5 U8.8 U14.9 U14.10 U14.11 U14.12

## Polygon pours and split planes (outlines as drawn)
no net on Top Layer (solid, pour order 1): 110,0 cw(c110,110) 0,110 cw(c110,110) 110,220 cw(c110,110) 220,110 cw(c110,110)
GND on Bottom Layer (solid, pour order 2): 110,0 cw(c110,110) 0,110 cw(c110,110) 110,220 cw(c110,110) 220,110 cw(c110,110)
GND on Layer 3 (solid, pour order 3): 110,0 cw(c110,110) 0,110 cw(c110,110) 110,220 cw(c110,110) 220,110 cw(c110,110)
GND on Layer 4 (solid, pour order 4): 110,0 cw(c110,110) 0,110 cw(c110,110) 110,220 cw(c110,110) 220,110 cw(c110,110)

## Keep-outs
Keep-Out Layer:
  circle w0.013: c110,110 r110
  circle w0.254: c110,110 r30

## Other copper
Top Layer:
  pour cut-out: 110,80 cw(c110,110) 80,110 cw(c110,110) 110,140 cw(c110,110) 140,110 cw(c110,110)

## Text inside footprints (layer, text, board x,y; h text height)
U11: Top Overlay "*" at 152.699,72.768 h1.27; Mechanical 13 "*" at 152.699,72.768 h1.27
U12: Top Overlay "*" at 164.719,72.768 h1.27; Mechanical 13 "*" at 164.719,72.768 h1.27